# EAGLE board Charger Controller, HV Board, TSAL, Strain Guage, and ADIS Practice (EAGLE 9.5.2), part 1 of 2
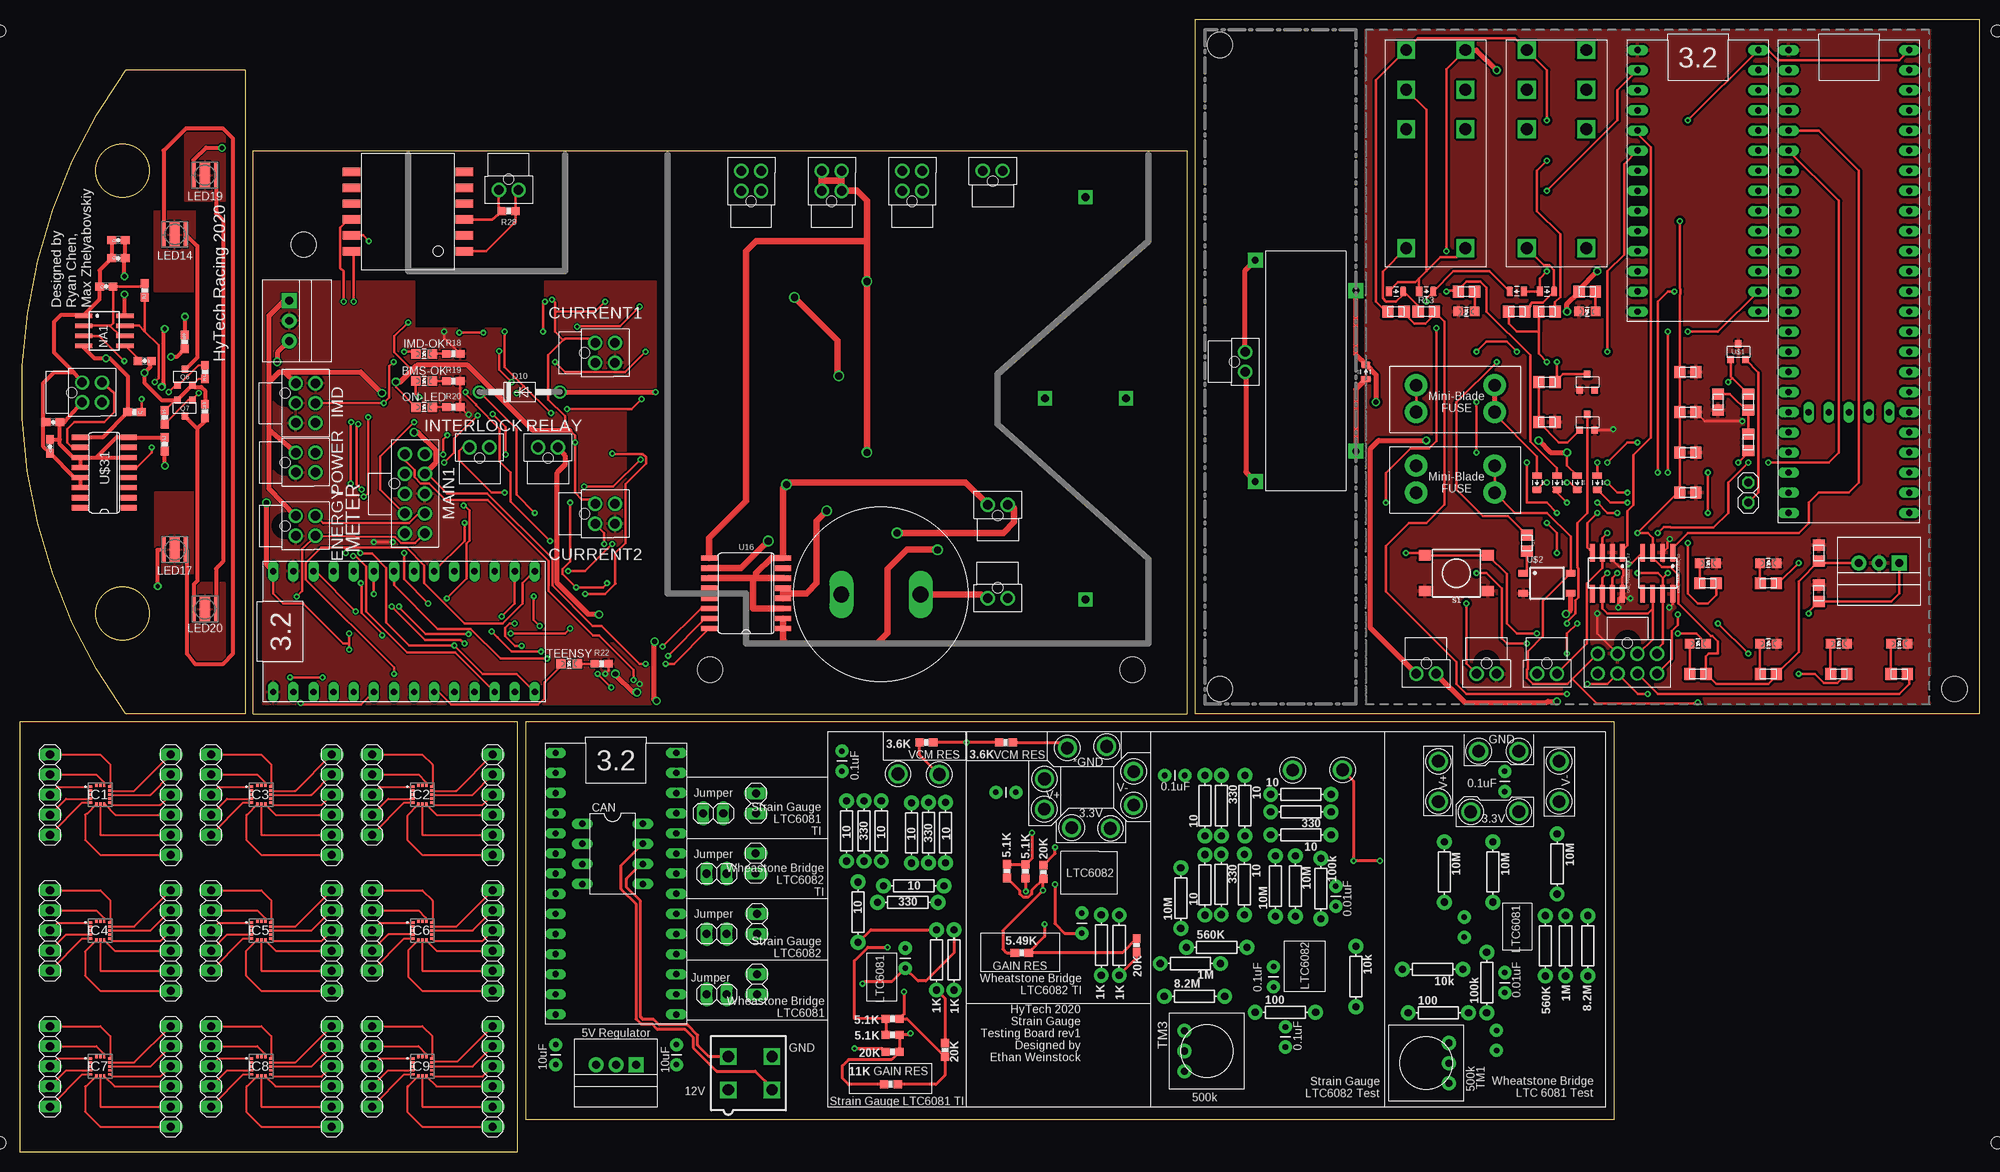
[diagram p0: board, top side]
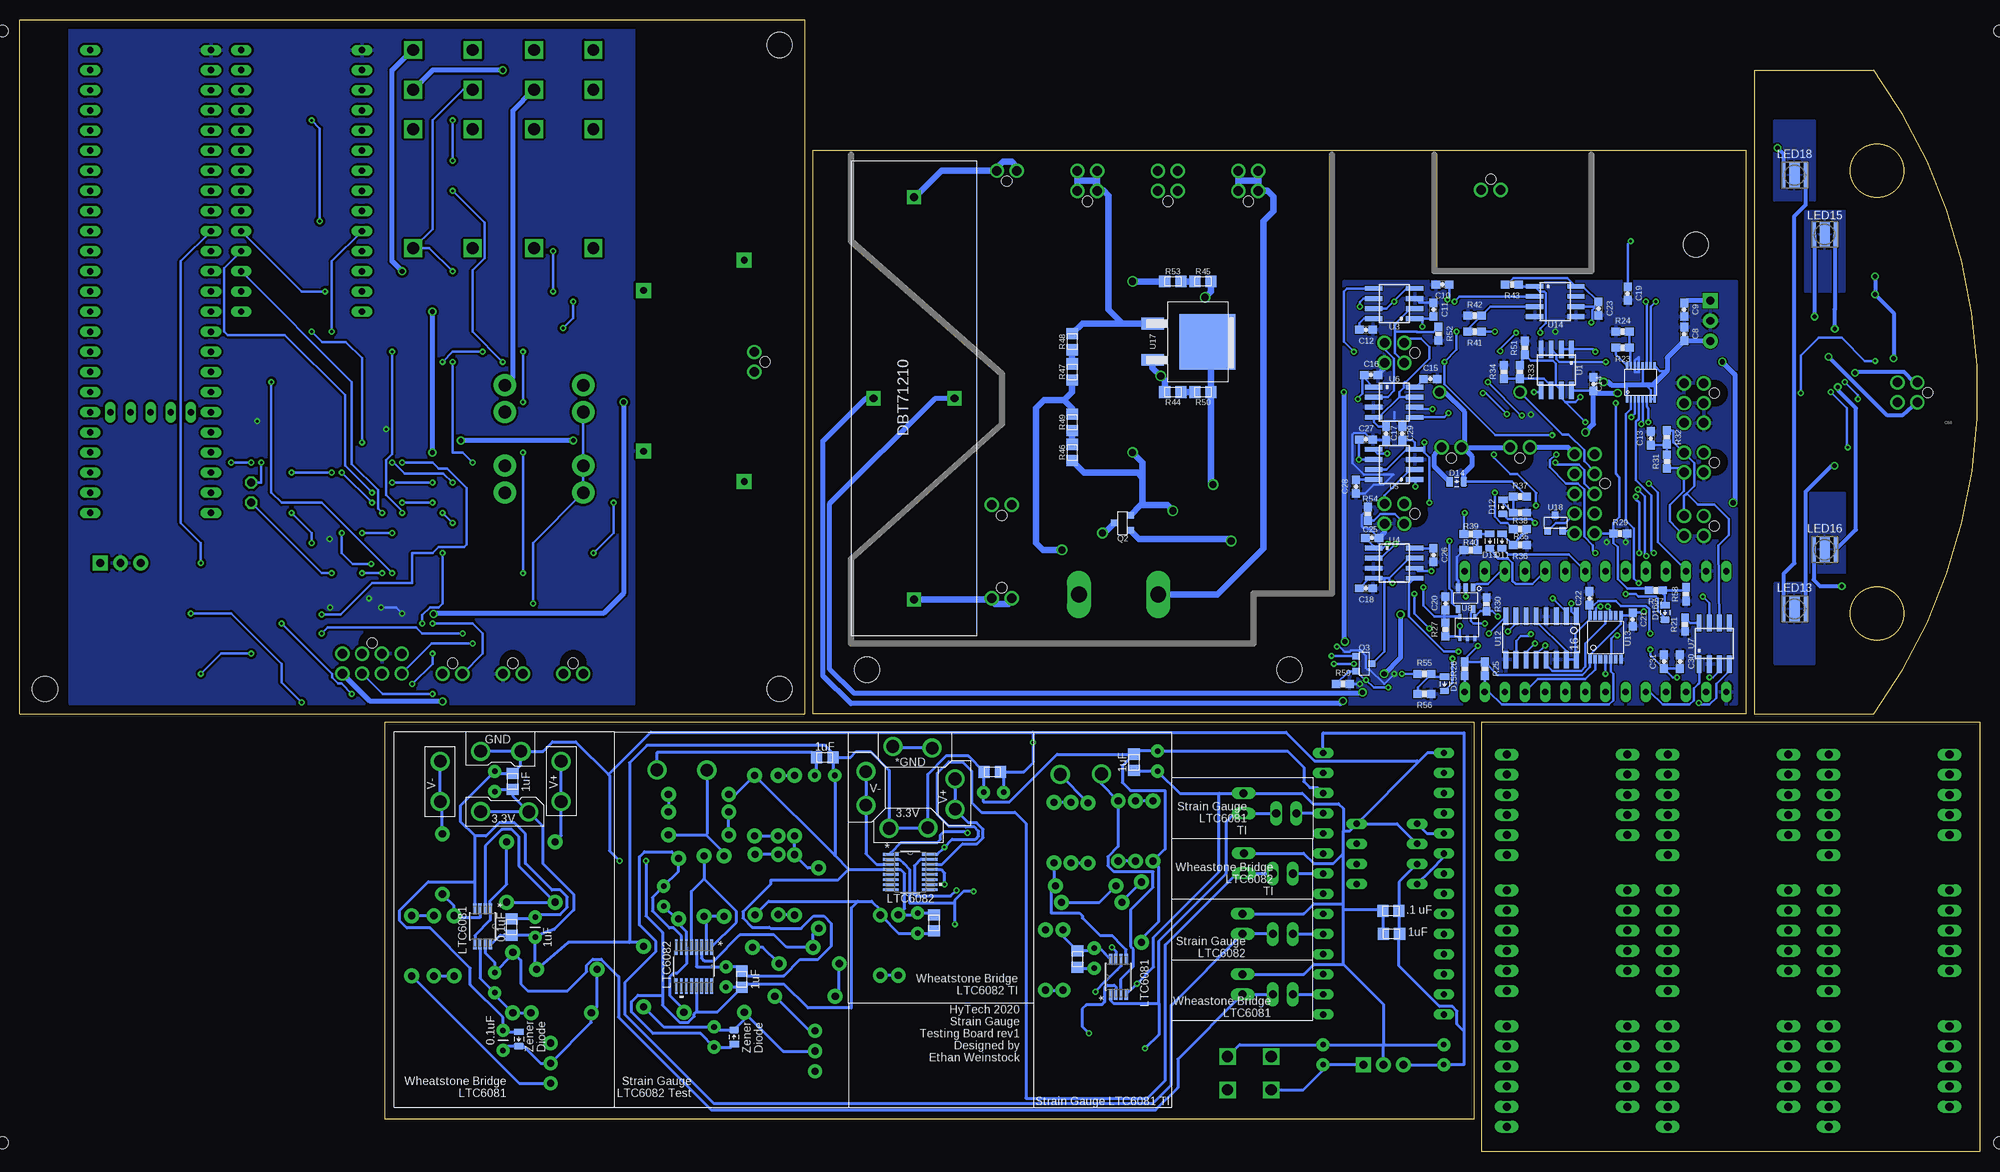
[diagram p1: board, bottom side, seen from below]

Size 247.35 x 142.9 mm. Coordinates in mm from the lower left corner, seen from the top.
Outline: 247.34,55.27 247.34,142.9 148.28,142.9 148.28,55.27 247.34,55.27
Outline: 29.44,55.27 147.3,55.27 147.3,126.39 29.44,126.39 29.44,55.27
Outline: 0,0 62.84,0 62.84,54.28 0,54.28 0,0
Outline: 201.23,54.28 63.84,54.28 63.84,4.09 201.23,4.09 201.23,54.28
Outline: 28.45,136.55 28.45,55.27 13.34,55.27 arc-71 13.36,136.55 28.45,136.55
Outline: circle at 12.95,123.85 radius 3.35
Outline: circle at 12.95,67.97 radius 3.35
Copper layers (1*16): Top 0.035mm / dielectric 1.5mm / Bottom 0.035mm
Design rules "DRC Advanced Circuits *": minimum track width 6mil, minimum drill 10mil, track to track 6mil, track to pad 6mil, pad to pad 6mil, via to via 6mil, smd to smd 6mil, copper to edge 40mil, drill to drill 6mil, minimum pad ring 10mil, minimum via ring 8mil, stop-mask expansion 4mil, vias tented up to drill 0mil, thermal gap 10mil
Net classes: 1 TS: clearance 2.25 mm to class 0; 2 ISO_SPI: clearance 2.25 mm to class 0, clearance 2.25 mm to class 1
Holes 3.2 mm at 244.17,58.45 151.46,139.73 151.46,58.45 35.84,114.5 140.44,60.86 87.1,60.86
Holes 1.5 mm at 249.56,141.48 -2.54,141.48 -2.54,1.14 249.56,1.14
tKeepout: area 241.2,55.4 to 247.2,61.4; area 148.5,136.7 to 154.5,142.7; area 148.5,55.4 to 154.5,61.4
tRestrict: area 241.2,55.4 to 247.2,61.4; area 148.5,136.7 to 154.5,142.7; area 148.5,55.4 to 154.5,61.4; area 32.8,111.5 to 38.8,117.5; area 84.1,57.9 to 90.1,63.9; area 137.4,57.9 to 143.4,63.9

## Footprints (pad centres in the part's own frame; a part is rotated, then mirrored left to right if it is on the bottom)
MINI-BLADE_FUSE_HOLDER = drill 1.613 pad 2.794: L1 0,3.404; L2 0,0; R1 9.906,3.404; R2 9.906,0
LED-805 = smd 1.2 x 1.2: A 0,-1.05; C 0,1.05
RELAY_DPDT = drill 1.5 square: 2 10.008,0; 3 5.004,0; 4 0,0; 5 0,7.493; 6 5.004,7.493; 7 10.008,7.493; COIL+ 25.019,0; COIL- 25.019,7.493
0805 = smd 1.4 x 1.5: 1 -1.025,0; 2 1.025,0
0603-CAP = smd 1.1 x 1: 1 -0.85,0; 2 0.85,0
LLS2V221MELZ = drill 2 long: P$1 -5,0; P$2 5,0
CAP-PTH-SMALL = drill 0.7 pad 1.651: 1 0,0; 2 2.54,0
1X02_SLIM = drill 1.016 octagon: 1 -1.27,0; 2 1.27,0
SOIC-08 = smd 0.6 x 2.2: 1 -1.905,-2.6; 2 -0.635,-2.6; 3 0.635,-2.6; 4 1.905,-2.6; 5 1.905,2.6; 6 0.635,2.6; 7 -0.635,2.6; 8 -1.905,2.6
NANO-FIT_VERTICAL-2 = drill 1.2: P$1 -1.25,0; P$2 1.25,0 | hole 1.3: 0,-1.34
NANO-FIT_VERTICAL-4 = drill 1.2: P$1 -1.25,0; P$2 1.25,0; P$3 -1.25,2.5; P$4 1.25,2.5 | hole 1.3: 0,-1.34
0805_D = smd 0.8 x 1.2: A -0.9,0; C 0.9,0
DO-41 = drill 1.118: A 5.08,0; C -5.08,0
3X3LGA = smd 0.5 x 0.3: 1 -1.25,1; 2 -1.25,0.5; 3 -1.25,0; 4 -1.25,-0.5; 5 -1.25,-1; 9 1.25,-1; 10 1.25,-0.5; 11 1.25,0; 12 1.25,0.5; 13 1.25,1 | smd 0.3 x 0.5: 6 -0.5,-1.25; 7 0,-1.25; 8 0.5,-1.25; 14 0.5,1.25; 15 0,1.25; 16 -0.5,1.25
NANO-FIT_VERTICAL-6 = drill 1.2: P$1 -2.5,0; P$2 0,0; P$3 2.5,0; P$4 -2.5,2.5; P$5 0,2.5; P$6 2.5,2.5 | hole 1.3: -1.25,-1.34
1X02 = drill 1.016 long: 1 -1.27,0; 2 1.27,0
1X06 = drill 1.016 long: 1 -6.35,0; 2 -3.81,0; 3 -1.27,0; 4 1.27,0; 5 3.81,0; 6 6.35,0
1X05 = drill 1.016 long: 1 -5.08,0; 2 -2.54,0; 3 0,0; 4 2.54,0; 5 5.08,0
XP-E2 = smd 0.5 x 3.3: A -1.4,0; C 1.4,0 | smd 1.3 x 3.3: X 0,0
NANO-FIT_VERTICAL-8 = drill 1.2: P$1 -3.75,0; P$2 -1.25,0; P$3 1.25,0; P$4 3.75,0; P$5 -3.75,2.5; P$6 -1.25,2.5; P$7 1.25,2.5; P$8 3.75,2.5 | hole 1.3: 0,-1.34
NANO-FIT_VERTICAL-10 = drill 1.2: P$1 -5,0; P$2 -2.5,0; P$3 0,0; P$4 2.5,0; P$5 5,0; P$6 -5,2.5; P$7 -2.5,2.5; P$8 0,2.5; P$9 2.5,2.5; P$10 5,2.5 | hole 1.3: -1.27,-1.34
SOT23 = smd 0.8 x 0.9: 1 -0.95,-1; 2 0.95,-1; 3 0,1
0603-RES = smd 1.1 x 1: 1 -0.85,0; 2 0.85,0
AXIAL-0.3 = drill 0.9 pad 1.88: P$1 -3.81,0; P$2 3.81,0
OKI-78SR = drill 1 pad 1.88 square: 1 -2.54,0 | drill 1 pad 1.88: 2 0,0; 3 2.54,0
TACTILE_SWITCH_SMD_6.2MM_TALL = smd 1.55 x 1.3: A1 -3.975,-2.25; A2 3.975,-2.25; B1 -3.975,2.25; B2 3.975,2.25
TEENSY_3.2_SIMPLE = drill 0.8 long: 3.3V 16.51,29.21; A0 16.51,3.81; A1 16.51,6.35; A2 16.51,8.89; A3 16.51,11.43; A4 16.51,13.97; A5 16.51,16.51; A6 16.51,19.05; A7 16.51,21.59; A8 16.51,24.13; A9 16.51,26.67; AGND 16.51,31.75; D0(RX1) 1.27,31.75; D1(TX1) 1.27,29.21; D2 1.27,26.67; D3(CANTX) 1.27,24.13; D4(CANRX) 1.27,21.59; D5 1.27,19.05; D6 1.27,16.51; D7(RX3) 1.27,13.97; D8(TX3) 1.27,11.43; D9(RX2) 1.27,8.89; D10(TX2) 1.27,6.35; D11 1.27,3.81; D12 1.27,1.27; D13 16.51,1.27; GND 1.27,34.29; VIN 16.51,34.29
TRIM-3386 = drill 0.9 pad 1.778: 1 -2.54,-2.857; 2 0,-2.857; 3 2.54,-2.857
SOT-23-5 = smd 1 x 0.55: 1 -1.35,0.95; 2 -1.35,0; 3 -1.35,-0.95; 4 1.35,-0.95; 5 1.35,0.95
MSOP-16 = smd 0.305 x 0.889: 1 -0.1,-0.5; 2 0.4,-0.5; 3 0.9,-0.5; 4 1.4,-0.5; 5 1.9,-0.5; 6 2.4,-0.5; 7 2.9,-0.5; 8 3.4,-0.5; 9 3.4,3.7; 10 2.9,3.7; 11 2.4,3.7; 12 1.9,3.7; 13 1.4,3.7; 14 0.9,3.7; 15 0.4,3.7; 16 -0.1,3.7
SOT23-5 = smd 0.61 x 0.406: EN -2.794,0; GND -2.794,0.94; VCC 0,1.905; WDI 0,0; WDO -2.794,1.905
HM2102NLT = smd 1.067 x 2.184: P$1 0,0; P$2 2,0; P$3 4,0; P$4 6,0; P$5 8,0; P$6 10,0; P$7 10,14.25; P$8 8,14.25; P$9 6,14.25; P$10 4,14.25; P$11 2,14.25; P$12 0,14.25
SOIC-16 = smd 0.6 x 2.2: 1 -4.445,-2.794; 2 -3.175,-2.794; 3 -1.905,-2.794; 4 -0.635,-2.794; 5 0.635,-2.794; 6 1.905,-2.794; 7 3.175,-2.794; 8 4.445,-2.794; 9 4.445,2.667; 10 3.175,2.667; 11 1.905,2.667; 12 0.635,2.667; 13 -0.635,2.667; 14 -1.905,2.667; 15 -3.175,2.667; 16 -4.445,2.667
TSSOP-14 = smd 0.45 x 1.1: 1 -1.958,-2.618; 2 -1.308,-2.618; 3 -0.657,-2.618; 4 -0.007,-2.618; 5 0.642,-2.618; 6 1.292,-2.618; 7 1.942,-2.618; 8 1.942,2.918; 9 1.292,2.918; 10 0.642,2.918; 11 -0.007,2.918; 12 -0.657,2.918; 13 -1.308,2.918; 14 -1.958,2.918
DBT71210 = drill 1 pad 1.778 square: COIL+ 30,-13; COIL- 30,-2.8; CONTACT1 55.4,-7.9; CONTACT2 4.6,-7.9
SO16-DW = smd 0.66 x 2.032: 1 -4.445,-4.65; 2 -3.175,-4.65; 3 -1.905,-4.65; 4 -0.635,-4.65; 5 0.635,-4.65; 6 1.905,-4.65; 7 3.175,-4.65; 8 4.445,-4.65; 9 4.445,4.65; 10 3.175,4.65; 11 1.905,4.65; 12 0.635,4.65; 13 -0.635,4.65; 14 -1.905,4.65; 15 -3.175,4.65; 16 -4.445,4.65
TO-252 = smd 1.499 x 2.794: 1 -2.286,0; 3 2.286,0 | smd 7.01 x 7.01: 2(TAB) 0,6.909
SSOP-16_GN = smd 1.981 x 0.356: 1 -2.464,2.223; 2 -2.464,1.587; 3 -2.464,0.953; 4 -2.464,0.318; 5 -2.464,-0.318; 6 -2.464,-0.953; 7 -2.464,-1.587; 8 -2.464,-2.223; 9 2.464,-2.223; 10 2.464,-1.587; 11 2.464,-0.953; 12 2.464,-0.318; 13 2.464,0.318; 14 2.464,0.953; 15 2.464,1.587; 16 2.464,2.223
SOP04 = smd 0.8 x 1.2: 1 -1.27,-3; 2 1.27,-3; 3 1.27,3; 4 -1.27,3
KT12-1A-40L-THT = drill 0.85 pad 1.9 square: C1 4.95,11.45; C2 25.25,11.45; S1 1.13,-1.25; S2 29.07,-1.25
TEENSY_3.5_EXT = drill 0.8 long: 3.3V 16.51,54.61; 3.3V_1 1.27,24.13; 3.3V_2 6.35,13.97; A0 16.51,29.21; A1 16.51,31.75; A2 16.51,34.29; A3 16.51,36.83; A4 16.51,39.37; A5 16.51,41.91; A6 16.51,44.45; A7 16.51,46.99; A8 16.51,49.53; A9 16.51,52.07; A12 1.27,3.81; A13 1.27,1.27; A14 16.51,1.27; A15 16.51,3.81; A16 16.51,6.35; A17 16.51,8.89; A18 16.51,11.43; A19 16.51,13.97; A20 16.51,16.51; A21 16.51,19.05; A22 16.51,21.59; AGND 16.51,57.15; D0(RX1) 1.27,57.15; D1(TX1) 1.27,54.61; D2 1.27,52.07; D3(CANTX) 1.27,49.53; D4(CANRX) 1.27,46.99; D5 1.27,44.45; D6 1.27,41.91; D7(RX3) 1.27,39.37; D8(TX3) 1.27,36.83; D9(RX2) 1.27,34.29; D10(TX2) 1.27,31.75; D11 1.27,29.21; D12 1.27,26.67; D13 16.51,26.67; D24 1.27,21.59; D25 1.27,19.05; D26 1.27,16.51; D27 1.27,13.97; D28 1.27,11.43; D29 1.27,8.89; D30 1.27,6.35; GND 1.27,59.69; GND_1 16.51,24.13; GND_2 8.89,13.97; PROG 11.43,13.97; RST 13.97,13.97; VBAT 3.81,13.97; VIN 16.51,59.69
MSOP-8_MS = smd 1.397 x 0.432: 1 -2.21,0.975; 2 -2.21,0.325; 3 -2.21,-0.325; 4 -2.21,-0.975; 5 2.21,-0.975; 6 2.21,-0.325; 7 2.21,0.325; 8 2.21,0.975
TEST_POINT = drill 1.6: P$1 0,0
DIL08 = drill 0.813 long: 1 -3.81,-3.81; 2 -1.27,-3.81; 3 1.27,-3.81; 4 3.81,-3.81; 5 3.81,3.81; 6 1.27,3.81; 7 -1.27,3.81; 8 -3.81,3.81
SO16 = smd 0.66 x 2.032: 1 -4.445,-3.073; 2 -3.175,-3.073; 3 -1.905,-3.073; 4 -0.635,-3.073; 5 0.635,-3.073; 6 1.905,-3.073; 7 3.175,-3.073; 8 4.445,-3.073; 9 4.445,3.073; 10 3.175,3.073; 11 1.905,3.073; 12 0.635,3.073; 13 -0.635,3.073; 14 -1.905,3.073; 15 -3.175,3.073; 16 -4.445,3.073
MINIFIT_5566-4 = drill 1.4 square: 1 2.1,-2.75; 2 -2.1,-2.75; 3 2.1,2.75; 4 -2.1,2.75

## Placement (x,y rotation side)
5ABOARDFUSE  [MINI-BLADE_FUSE_HOLDER]  176.23,83.21 0 top
5ASHUTDOWNFUSE  [MINI-BLADE_FUSE_HOLDER]  176.23,93.37 0 top
BMS-OK  GREEN  [LED-805]  51.03,97.31 270 top
BMS_SHUTDOWN_RLY  RT424009  [RELAY_DPDT]  190.2,139.09 270 top
C1  1uF  [0805]  210.52,93.37 180 top
C2  .1uF  [0805]  210.52,98.45 180 top
C3  10uF  [0805]  227.03,70.51 270 top
C4  10uF  [0805]  227.03,75.59 270 top
C5  4.7nF  [0805]  214.33,94.64 270 top
C6  1uF  [0805]  210.52,83.21 180 top
C7  .1uF  [0805]  210.52,88.29 180 top
C8  10uF  [0603-CAP]  37.29,103.25 90 bottom
C9  10uF  [0603-CAP]  37.29,106.3 270 bottom
C10  0.1uF  [0603-CAP]  67.79,109.5 180 bottom
C11  0.1uF  [0603-CAP]  68.94,106.32 90 bottom
C12  530pF  [0603-CAP]  77.44,103.78 0 bottom
C13  4.7nF  [0603-CAP]  41.5,90.07 270 bottom
C14  0.1uF  [0603-CAP]  48.74,96.93 90 bottom
C15  530pF  [0603-CAP]  69.32,97.56 0 bottom
C16  0.1uF  [0603-CAP]  76.81,98.07 0 bottom
C17  0.1uF  [0603-CAP]  74.9,90.7 270 bottom
C18  0.1uF  [0603-CAP]  77.44,71.15 0 bottom
C19  27pF  [0603-CAP]  44.42,108.36 270 bottom
C20  0.1uF  [0603-CAP]  67.41,69.24 90 bottom
C21  0.1uF  [0603-CAP]  43.79,67.21 270 bottom
C22  0.1uF  [0603-CAP]  49.25,69.88 90 bottom
C23  0.1uF  [0603-CAP]  48.11,106.45 270 bottom
C24  180µF  [LLS2V221MELZ]  108.67,70.37 180 top
C25  0.1uF  [0603-CAP]  76.68,77.5 0 bottom
C26  530pF  [0603-CAP]  68.94,75.34 270 bottom
C27  0.1uF  [0603-CAP]  77.44,89.94 0 bottom
C28  530pF  [0603-CAP]  78.71,83.97 270 bottom
C29  0.1uF  [0603-CAP]  72.87,90.7 90 bottom
C30  0.1uF  [0603-CAP]  37.82,61.87 90 bottom
C31  0.1uF  [0603-CAP]  39.85,61.87 90 bottom
C38  0.1uF  [0805]  185.25,28.37 270 bottom
C39  0.1uF  [CAP-PTH-SMALL]  144.49,47.52 0 top
C40  1uF  [0805]  145.76,49.81 180 bottom
C41  0.01uF  [CAP-PTH-SMALL]  166.08,31.01 90 top
C42  0.1uF  [CAP-PTH-SMALL]  158.23,20.83 90 top
C43  1uF  [0805]  156.22,21.79 270 bottom
C44  0.1uF  [CAP-PTH-SMALL]  159.73,13.23 90 top
C45  0.01uF  [CAP-PTH-SMALL]  187.41,20.09 90 top
C46  0.1uF  [CAP-PTH-SMALL]  187.41,45.49 90 top
C47  1uF  [0805]  185.13,46.76 90 bottom
C48  0.1uF  [CAP-PTH-SMALL]  103.74,50.6 270 top
C49  1uF  [0805]  106.74,49.17 270 bottom
C50  0.1uF  [CAP-PTH-SMALL]  186.37,15.34 270 bottom
C51  1uF  [CAP-PTH-SMALL]  182.31,27.1 90 bottom
C52  10uF  [CAP-PTH-SMALL]  82.87,13.54 270 top
C53  10uF  [CAP-PTH-SMALL]  67.63,13.54 270 top
C54  .1 uF  [0805]  74.31,30.43 0 bottom
C55  1uF  [0805]  74.23,27.53 0 bottom
C56  0.1uF  [CAP-PTH-SMALL]  111.75,23.19 90 top
C57  1uF  [0805]  113.85,24.33 270 bottom
C58  0.1uF  [CAP-PTH-SMALL]  125.72,45.39 180 top
C59  1uF  [0805]  124.62,47.98 0 bottom
C60  1uF  [0805]  131.96,28.91 270 bottom
C61  0.1uF  [CAP-PTH-SMALL]  134.05,27.61 90 top
C62  4.7uF  [0603-CAP]  10.92,109.25 180 top
C63  10nF  [0603-CAP]  15.75,99.85 0 top
C64  0.1uF  [0603-CAP]  12.45,112.8 180 top
C65  1uF  [0603-CAP]  12.45,115.09 180 top
C66  1uF  [0603-CAP]  4.19,92.1 180 top
C67  0.1uF  [0603-CAP]  3.81,89.05 270 top
CAN_TERM_JMP  M02_SLIM  [1X02_SLIM]  218.14,83.21 90 top
CAN_TRANSCEIVER_3.2  MCP2551  [SOIC-08]  200.36,73.05 180 top
CAN_TRANSCEIVER_3.5  MCP2551  [SOIC-08]  206.71,73.05 180 top
CHARGER  CHARGE CONTROL  [NANO-FIT_VERTICAL-2]  154.64,99.72 270 top
CURRENT1  CURRENT  [NANO-FIT_VERTICAL-4]  72.62,100.86 270 top
CURRENT2  CURRENT  [NANO-FIT_VERTICAL-4]  72.62,80.54 270 top
D1  TS4148 RYG  [0805_D]  188.93,108.61 180 top
D2  TS4148 RYG  [0805_D]  199.09,84.48 270 top
D3  DIODE  [0805_D]  169.88,98.45 90 top
D4  TS4148 RYG  [0805_D]  196.55,84.48 270 top
D5  TS4148 RYG  [0805_D]  194.01,84.48 270 top
D6  TS4148 RYG  [0805_D]  192.74,108.61 0 top
D7  TS4148 RYG  [0805_D]  173.69,108.61 0 top
D8  TS4148 RYG  [0805_D]  191.47,84.48 270 top
D9  TS4148 RYG  [0805_D]  177.5,108.61 0 top
D10  DIODE  [DO-41]  63.09,95.91 0 top
D11  TS4148 RYG  [0805_D]  60.3,77.11 270 bottom
D12  TS4148 RYG  [0805_D]  60.17,81.43 270 bottom
D13  TS4148 RYG  [0805_D]  61.82,77.11 270 bottom
D14  TS4148 RYG  [0805_D]  66.01,84.61 0 bottom
D15  TS4148 RYG  [0805_D]  67.54,59.08 270 bottom
D16  TS4148 RYG  [0805_D]  39.73,68.1 270 bottom
DISCH+  DISCHARGE+  [NANO-FIT_VERTICAL-2]  122.78,123.85 0 top
ENERGYMETER  ENERGY METER  [NANO-FIT_VERTICAL-4]  34.82,79.02 270 top
HV+FUSED_1A-IMD+  HV+  [NANO-FIT_VERTICAL-4]  112.62,121.31 0 top
HV+UNFUSED  HV+UNFUSED  [NANO-FIT_VERTICAL-2]  123.42,69.88 180 top
HV-FUSED_1A-IMD-  HV-  [NANO-FIT_VERTICAL-4]  102.46,121.31 0 top
HV-UNFUSED_DISCHARGE-  HV-UNFUSED  [NANO-FIT_VERTICAL-4]  92.3,121.31 0 top
IC1  KX124-1051  [3X3LGA]  10.16,45.08 0 top
IC2  KX124-1051  [3X3LGA]  50.8,45.08 0 top
IC3  KX124-1051  [3X3LGA]  30.48,45.08 0 top
IC4  KX124-1051  [3X3LGA]  10.16,27.94 0 top
IC5  KX124-1051  [3X3LGA]  30.48,27.94 0 top
IC6  KX124-1051  [3X3LGA]  50.8,27.94 0 top
IC7  KX124-1051  [3X3LGA]  10.16,10.79 0 top
IC8  KX124-1051  [3X3LGA]  30.48,10.79 0 top
IC9  KX124-1051  [3X3LGA]  50.8,10.79 0 top
IMD  IMD  [NANO-FIT_VERTICAL-6]  34.82,94.51 270 top
IMD-OK  YELLOW  [LED-805]  51.03,100.74 270 top
IMD_SHUTDOWN_RLY  RT424009  [RELAY_DPDT]  174.96,139.09 270 top
INDICATOR  INDICATOR  [NANO-FIT_VERTICAL-2]  123.42,81.69 0 top
INTERLOCK  INTERLOCK  [NANO-FIT_VERTICAL-2]  58.01,88.93 0 top
ISO_SPI  ISO_SPI  [NANO-FIT_VERTICAL-2]  61.7,121.44 180 top
J1  JUMPER.1  [1X02]  87.95,19.89 0 top
J2  JUMPER.1  [1X02]  87.95,27.51 0 top
J3  JUMPER.1  [1X02]  87.95,35.13 0 top
J4  JUMPER.1  [1X02]  87.51,42.72 0 top
JP1  [1X06]  19.05,26.67 90 top
JP2  [1X06]  59.69,26.67 90 top
JP3  [1X05]  44.45,27.94 90 top
JP4  [1X05]  3.81,27.94 90 top
JP5  [1X06]  39.37,43.81 90 top
JP6  [1X05]  24.13,45.08 90 top
JP7  [1X06]  39.37,26.67 90 top
JP8  [1X05]  24.13,27.94 90 top
JP9  [1X06]  19.05,43.81 90 top
JP10  [1X05]  3.81,45.08 90 top
JP11  [1X06]  59.69,43.81 90 top
JP12  [1X05]  44.45,45.08 90 top
JP13  [1X06]  19.05,9.52 90 top
JP14  [1X05]  3.81,10.79 90 top
JP15  [1X06]  39.37,9.52 90 top
JP16  [1X05]  24.13,10.79 90 top
JP17  [1X06]  59.69,9.52 90 top
JP18  [1X05]  44.45,10.79 90 top
JP19  M02  [1X02]  93.03,21.16 270 top
JP20  M02  [1X02]  93.03,28.78 270 top
JP21  M02  [1X02]  92.9,43.99 270 top
JP22  M02  [1X02]  92.87,36.42 270 top
LED1  Purple  [LED-805]  220.68,64.16 270 top
LED3  Yellow  [LED-805]  237.19,64.16 270 top
LED4  Green  [LED-805]  229.57,64.16 270 top
LED6  White  [LED-805]  211.79,64.16 270 top
LED13  RED  [XP-E2]  23.37,68.53 180 bottom
LED14  GRN  [XP-E2]  19.56,115.8 0 top
LED15  GRN  [XP-E2]  19.56,115.8 0 bottom
LED16  GRN  [XP-E2]  19.56,76.02 180 bottom
LED17  GRN  [XP-E2]  19.56,76.02 0 top
LED18  RED  [XP-E2]  23.37,123.29 180 bottom
LED19  RED  [XP-E2]  23.37,123.29 0 top
LED20  RED  [XP-E2]  23.37,68.53 180 top
LT1790B  1.25V  [0805_D]  184.36,14.25 270 bottom
LT1790B2  1.25V  [0805_D]  157.19,14.5 90 bottom
MAIN  MAIN CONNECTOR  [NANO-FIT_VERTICAL-8]  202.9,62.89 180 top
MAIN1  MAIN  [NANO-FIT_VERTICAL-10]  48.62,83.08 270 top
NA1  NA555SO-8  [SOIC-08]  10.67,103.64 270 top
ON-LED  PURPLE  [LED-805]  51.03,94.01 270 top
POWER  POWER  [NANO-FIT_VERTICAL-2]  185.12,60.35 180 top
POWER1  POWER  [NANO-FIT_VERTICAL-4]  34.82,87.02 270 top
POWERTAIL  Powerswitch Tail  [NANO-FIT_VERTICAL-2]  192.74,60.35 180 top
Q1  [SOT23]  197.82,92.1 0 top
Q2  DMG3406L  [SOT23]  108.18,79.4 90 bottom
Q3  DMG3406L  [SOT23]  77.7,61.62 270 bottom
Q6  [SOT23]  20.83,97.82 0 top
Q7  [SOT23]  20.83,93.88 180 top
R1  20  [0805]  188.93,106.07 0 top
R1_1  5.1K  [0603-RES]  110.15,14.76 180 top
R1_2  20K  [0603-RES]  110.15,12.62 180 top
R1_3  5.1K  [0603-RES]  110.15,16.81 180 top
R1_4  20K  [0603-RES]  116.75,12.88 270 top
R1_5  20K  [0603-RES]  140.96,26.09 90 top
R1_6  5.1K  [0603-RES]  124.6,35.43 90 top
R1_7  20K  [0603-RES]  129.17,35.33 90 top
R1_8  5.1K  [0603-RES]  126.93,35.41 90 top
R1_9  5.49K  [0603-RES]  126.45,25.15 180 top
R1_11  11K  [0603-RES]  109.94,8.53 180 top
R2  2k  [0805]  192.74,106.07 0 top
R3  2k  [0805]  182.58,108.61 0 top
R4  20k  [0805]  197.82,108.61 0 top
R5  270  [0805]  220.68,60.35 180 top
R6  5.1k  [0805]  211.79,60.35 180 top
R7  2k  [0805]  237.19,60.35 180 top
R8  33  [0805]  229.57,60.35 180 top
R9  60  [0805]  218.14,94.64 270 top
R10  60  [0805]  218.14,89.56 270 top
R11  40k  [0805]  192.74,97.18 0 top
R12  10k  [0805]  192.74,92.1 180 top
R13  20  [0805]  177.5,106.07 180 top
R14  360  [0805]  190.2,76.86 270 top
R15  68  [0805]  213.06,71.78 0 top
R16  2k  [0805]  173.69,106.07 180 top
R17  68  [0805]  220.68,71.78 0 top
R18  820  [0603-RES]  54.71,100.74 180 top
R19  2k  [0603-RES]  54.71,97.31 0 top
R20  270  [0603-RES]  54.71,94.01 0 top
R21  1k  [0603-RES]  37.19,66.57 90 bottom
R22  43  [0603-RES]  73.43,61.62 0 top
R23  1k  [0603-RES]  45.06,101.5 0 bottom
R24  1k  [0603-RES]  45.06,103.53 180 bottom
R25  2k  [0603-RES]  62.46,60.99 270 bottom
R26  2k  [0603-RES]  65,60.99 270 bottom
R27  430  [0603-RES]  67.41,65.94 270 bottom
R28  100  [0603-RES]  61.7,118.77 180 top
R29  2k  [0603-RES]  45.36,78.08 0 bottom
R30  10k  [0603-RES]  62.23,69.11 90 bottom
R31  60  [0603-RES]  39.47,87.15 270 bottom
R32  60  [0603-RES]  39.47,90.2 90 bottom
R33  4k  [0603-RES]  58.01,98.45 90 bottom
R34  2k  [0603-RES]  60.05,98.45 270 bottom
R35  43k  [0603-RES]  58.01,78.64 0 bottom
R36  12k  [0603-RES]  58.01,76.61 180 bottom
R37  43k  [0603-RES]  58.01,82.7 180 bottom
R38  12k  [0603-RES]  58.01,80.67 180 bottom
R39  43k  [0603-RES]  64.24,78 0 bottom
R40  12k  [0603-RES]  64.24,75.97 0 bottom
R41  261  [0603-RES]  63.73,103.53 0 bottom
R42  5K  [0603-RES]  63.73,105.56 0 bottom
R43  2k  [0603-RES]  59.03,109.5 180 bottom
R44  2k  [0805]  101.83,95.91 0 bottom
R45  20k  [0805]  98.02,109.88 180 bottom
R46  1.4k  [0805]  114.53,88.29 90 bottom
R47  510k  [0805]  114.53,98.45 270 bottom
R48  510k  [0805]  114.53,102.26 90 bottom
R49  14k  [0805]  114.53,92.1 90 bottom
R50  2k  [0805]  98.02,95.91 0 bottom
R51  2k  [0603-RES]  57.38,101.5 90 bottom
R52  10K  [0603-RES]  68.3,103.28 270 bottom
R53  20k  [0805]  101.83,109.88 180 bottom
R54  10K  [0603-RES]  77.19,80.54 90 bottom
R55  5k  [0603-RES]  70.08,60.35 0 bottom
R56  5k  [0603-RES]  70.08,57.81 180 bottom
R57  43k  [0603-RES]  40.87,70.89 0 bottom
R58  12k  [0603-RES]  37.06,70.38 90 bottom
R59  2k  [0603-RES]  80.37,59.08 0 bottom
R67  10M  [AXIAL-0.3]  179.79,35.33 270 top
R68  10  [AXIAL-0.3]  149.57,43.71 270 top
R69  10  [AXIAL-0.3]  149.59,33.71 90 top
R70  10M  [AXIAL-0.3]  158.46,33.55 270 top
R71  10M  [AXIAL-0.3]  146.52,32.03 270 top
R72  10M  [AXIAL-0.3]  194.02,36.35 270 top
R73  8.2M  [AXIAL-0.3]  148.25,19.66 0 top
R74  10M  [AXIAL-0.3]  161,33.55 270 top
R75  100k  [AXIAL-0.3]  164.22,33.22 90 top
R76  100  [AXIAL-0.3]  159.73,17.63 0 top
R77  10k  [AXIAL-0.3]  168.62,22.12 90 top
R78  10  [AXIAL-0.3]  105.8,30.25 90 top
R79  330  [AXIAL-0.3]  114.69,40.28 90 top
R80  10  [AXIAL-0.3]  154.6,43.71 270 top
R81  8.2M  [AXIAL-0.3]  197.88,26.01 270 top
R82  10  [AXIAL-0.3]  112.84,33.58 0 top
R83  10  [AXIAL-0.3]  116.83,40.28 270 top
R84  330  [AXIAL-0.3]  151.62,33.76 270 top
R85  10M  [AXIAL-0.3]  185.89,35.33 270 top
R86  330  [AXIAL-0.3]  112.05,31.5 0 top
R87  10  [AXIAL-0.3]  112.53,40.26 270 top
R88  330  [AXIAL-0.3]  151.67,43.71 90 top
R89  10  [AXIAL-0.3]  154.57,33.73 90 top
R90  1M  [AXIAL-0.3]  147.74,23.77 0 top
R91  100k  [AXIAL-0.3]  185.13,21.36 90 top
R92  560K  [AXIAL-0.3]  151.06,25.83 0 top
R93  1M  [AXIAL-0.3]  195.08,26.01 270 top
R94  560K  [AXIAL-0.3]  192.54,26.01 270 top
R95  100  [AXIAL-0.3]  179.03,17.55 0 top
R96  10k  [AXIAL-0.3]  178.32,23.04 0 top
R97  3.6K  [0603-RES]  114.41,51.66 180 top
R98  330  [AXIAL-0.3]  106.54,40.51 90 top
R99  10  [AXIAL-0.3]  104.33,40.51 270 top
R100  10  [AXIAL-0.3]  108.72,40.51 270 top
R101  1K  [AXIAL-0.3]  115.71,24.23 90 top
R102  10  [AXIAL-0.3]  161.68,40.01 180 top
R103  10  [AXIAL-0.3]  161.68,45.14 180 top
R104  330  [AXIAL-0.3]  161.68,42.93 0 top
R105  1K  [AXIAL-0.3]  117.89,24.23 270 top
R106  1K  [AXIAL-0.3]  136.49,26.11 90 top
R107  1K  [AXIAL-0.3]  138.75,26.09 270 top
R108  3.6K  [0603-RES]  124.45,51.69 0 top
R109  330R  [0603-RES]  20.83,102.26 90 top
R110  50k  [0603-RES]  15.75,108.74 270 top
R111  330R  [0603-RES]  18.29,89.31 90 top
R112  1k  [0603-RES]  14.48,93.37 0 top
R113  2k  [0603-RES]  23.37,93.5 90 top
R114  2k  [0603-RES]  23.37,98.45 270 top
R115  2k  [0603-RES]  18.29,92.74 90 top
REG  5V  [OKI-78SR]  234.65,74.32 180 top
REG1  5V  [OKI-78SR]  75.25,11 180 top
RELAY  RELAY  [NANO-FIT_VERTICAL-2]  66.65,88.93 0 top
S1  [TACTILE_SWITCH_SMD_6.2MM_TALL]  181.31,73.05 180 top
SHUTDOWN_B  Yellow  [LED-805]  182.58,106.07 90 top
SHUTDOWN_BUTTON  Shutdown Button  [NANO-FIT_VERTICAL-2]  177.5,60.35 180 top
SHUTDOWN_C  Green  [LED-805]  197.82,106.07 90 top
STATUS  RED  [LED-805]  213.06,74.32 270 top
STATUS1  RED  [LED-805]  220.68,74.32 270 top
TEENSY  BLUE  [LED-805]  69.32,61.62 270 top
TEENSY3.2  TEENSY_3.2_SIMPLE  [TEENSY_3.2_SIMPLE]  66.27,56.79 90 top
TM1  500k  [TRIM-3386]  177.51,11.2 90 top
TM3  500k  [TRIM-3386]  149.82,12.73 270 top
U1  OPA2172  [SOIC-08]  53.44,98.7 180 bottom
U2  OKI-78SR-5  [OKI-78SR]  33.99,104.9 270 top
U3  MAX7480  [SOIC-08]  73.89,107.09 90 bottom
U4  MAX7480  [SOIC-08]  73.89,74.32 270 bottom
U5  MAX7480  [SOIC-08]  73.89,86.77 90 bottom
U6  MAX7480  [SOIC-08]  73.89,94.64 270 bottom
U7  MCP2551  [SOIC-08]  33.5,64.16 0 bottom
U8  SN74LVC1G08  [SOT-23-5]  64.87,69.9 270 bottom
U9  LTC6820  [MSOP-16]  44.42,95.53 0 bottom
U10  STWD100  [SOT23-5]  63.7,67.59 90 bottom
U11  HM2102NLT  [HM2102NLT]  56.11,113.69 90 top
U12  MCP3208SOIC  [SOIC-16]  55.35,64.8 180 bottom
U13  TXB0104TSSOP  [TSSOP-14]  47.22,64.8 0 bottom
U14  MCP6542SOIC  [SOIC-08]  53.57,107.34 270 bottom
U15  [DBT71210]  126.59,125.12 270 bottom
U16  UCC21520A  [SO16-DW]  91.67,70.51 90 top
U17  LR8  [TO-252]  104.37,102.26 270 bottom
U18  CDSOT23-T24CAN-Q  [SOT23]  53.57,79.4 0 bottom
U19  LTC6082CGNPBF  [SSOP-16_GN]  162.27,23.39 270 bottom
U20  LTC6082CGNPBF  [SSOP-16_GN]  134.96,35.33 0 bottom
U$1  CDSOT23-T24CAN-Q  [SOT23]  216.87,100.99 0 top
U$2  CPC1002N  [SOP04]  192.74,71.78 270 top
U$3  KT12-1A-40L-THT  [KT12-1A-40L-THT]  157.18,113.69 270 top
U$4  TEENSY_3.2_SIMPLE  [TEENSY_3.2_SIMPLE]  202.9,104.8 0 top
U$5  TEENSY_3.5_EXT  [TEENSY_3.5_EXT]  221.95,79.4 0 top
U$7  LTC6081  [MSOP-8_MS]  188.94,28.47 270 bottom
U$8  TEENSY_3.2_SIMPLE  [TEENSY_3.2_SIMPLE]  66.36,16.08 0 top
U$9  TEST_POINT  [TEST_POINT]  110.83,47.7 180 top
U$10  TEST_POINT  [TEST_POINT]  160.64,48.18 180 top
U$11  TEST_POINT  [TEST_POINT]  189.19,42.95 180 top
U$12  TEST_POINT  [TEST_POINT]  179.03,49.3 90 top
U$13  TEST_POINT  [TEST_POINT]  179.03,44.22 90 top
U$14  TEST_POINT  [TEST_POINT]  184.11,50.57 180 top
U$15  TEST_POINT  [TEST_POINT]  189.19,50.57 180 top
U$16  TEST_POINT  [TEST_POINT]  194.27,44.22 270 top
U$17  TEST_POINT  [TEST_POINT]  194.27,49.3 270 top
U$18  TEST_POINT  [TEST_POINT]  183.12,42.93 180 top
U$19  TEST_POINT  [TEST_POINT]  116.04,47.65 180 top
U$20  TEST_POINT  [TEST_POINT]  166.94,48.21 180 top
U$21  LTC6081  [MSOP-8_MS]  108.7,22.1 90 bottom
U$22  MCP2551DIL  [DIL08]  74.81,37.62 270 top
U$23  TEST_POINT  [TEST_POINT]  132.75,40.92 180 top
U$24  TEST_POINT  [TEST_POINT]  129.3,43.26 90 top
U$25  TEST_POINT  [TEST_POINT]  129.32,47.09 90 top
U$26  TEST_POINT  [TEST_POINT]  132.19,50.98 180 top
U$27  TEST_POINT  [TEST_POINT]  137.17,51.18 180 top
U$28  TEST_POINT  [TEST_POINT]  140.57,43.76 90 top
U$29  TEST_POINT  [TEST_POINT]  140.57,48.01 90 top
U$30  TEST_POINT  [TEST_POINT]  137.63,40.84 180 top
U$31  MAX4622  [SO16]  10.67,85.75 90 top
X2  CONNECTOR-4  [MINIFIT_5566-4]  92.16,9.93 270 top
X3  CONNECTOR-4NANO-FIT-VERTICAL-4  [NANO-FIT_VERTICAL-4]  7.87,95.87 270 top
ZENER  [SOT23]  197.82,97.18 0 top

## Library data of the parts
5ABOARDFUSE 5ASHUTDOWNFUSE BMS-OK BMS_SHUTDOWN_RLY C1-C31 C38-C67 CAN_TERM_JMP CAN_TRANSCEIVER_3.2 CAN_TRANSCEIVER_3.5 CHARGER CURRENT1 CURRENT2 D1-D16 DISCH+ ENERGYMETER HV+FUSED_1A-IMD+ HV+UNFUSED HV-FUSED_1A-IMD- HV-UNFUSED_DISCHARGE- IMD IMD-OK IMD_SHUTDOWN_RLY INDICATOR INTERLOCK ISO_SPI J1-J4 JP1-JP22 LED1 LED3 LED4 LED6 LED13-LED20 LT1790B LT1790B2 MAIN MAIN1 NA1 ON-LED POWER POWER1 POWERTAIL Q1-Q3 Q6 Q7 R1 R1_1-R1_9 R1_11 R2-R59 R67-R115 REG REG1 RELAY S1 SHUTDOWN_B SHUTDOWN_BUTTON SHUTDOWN_C STATUS STATUS1 TEENSY TEENSY3.2 TM1 TM3 U1-U18 U$1-U$5 U$7-U$31 X3 ZENER = HyTechDevices
IC1-IC9 = samacsys; DESCRIPTION: TRI-AXIS, USER SELECTABLE +/- 2G, 4G, 8G, DIGITAL (I2C/SPI) OUTPUT, INTEGRATED FIFO/FILO BUFFER, 3X3X0.9MM LGA - KX124-1051; HEIGHT: mm; MANUFACTURER_NAME: Kionix; MANUFACTURER_PART_NUMBER: KX124-1051; MOUSER_PART_NUMBER: 912-KX124-1051-FR; MOUSER_PRICE-STOCK: https://www.mouser.com/Search/Refine.aspx?Keyword=912-KX124-1051-FR
U19 U20 = HyTechDevices; MANUFACTURER_PART_NUMBER: LTC6082CGN#PBF; VENDOR: Linear Technology
X2 = HyTechDevices; OC_FARNELL: unknown; OC_NEWARK: unknown

## Nets
3V3: C38.2 C39.1 C40.1 C42.2 C43.1 C46.1 C47.1 C48.1 C49.1 C51.1 C56.2 C57.1 C58.1 C59.1 C60.1 C61.2 R77.P$2 R78.P$1 R80.P$1 R96.P$2 R99.P$2 R101.P$2 R103.P$2 R106.P$2 U19.4 U20.4 U$7.8 U$8.3.3V U$11.P$1 U$18.P$1 U$21.8 U$23.P$1 U$30.P$1
60V_THRESHOLD_SIGNAL: MAIN1.P$1 Q3.2 R55.1 R59.1
60V_THRESHOLD_TEENSY: D15.C TEENSY3.2.A6
+3V3: C21.1 R25.1 R26.1 TEENSY3.2.3.3V U8.5 U9.6 U13.1 U13.8
+5V: C1.2 C2.2 C4.2 C6.2 C7.2 CAN_TRANSCEIVER_3.2.3 CAN_TRANSCEIVER_3.5.3 POWERTAIL.P$1 R5.1 R6.1 REG.3 U$4.VIN U$5.VIN
+5V1: C8.1 C10.1 C17.1 C18.1 C20.1 C22.1 C23.1 C29.1 C30.1 C31.1 CURRENT1.P$1 CURRENT2.P$1 ON-LED.A Q3.3 R27.1 R43.2 TEENSY3.2.VIN U2.3 U3.4 U3.7 U4.4 U4.7 U5.4 U5.7 U6.4 U6.7 U7.3 U9.1 U9.7 U9.8 U9.9 U9.12 U10.VCC U12.5 U12.15 U12.16 U13.14 U14.6 U14.8
+5V2: C53.2 C54.2 C55.2 REG1.3 U$8.VIN U$22.3
+12V: 5ABOARDFUSE.R1 5ABOARDFUSE.R2 C3.2 MAIN.P$4 REG.1 U$2.4
+12V1: C9.1 C14.1 ENERGYMETER.P$1 IMD.P$1 MAIN1.P$7 POWER1.P$1 U1.8 U2.1 U16.16
+12V2: C52.2 REG1.1 X2.1
+12VIN: 5ABOARDFUSE.L1 5ABOARDFUSE.L2 5ASHUTDOWNFUSE.L1 5ASHUTDOWNFUSE.L2 POWER.P$2
BMS_OK: MAIN.P$7 R1.1 R2.1 R8.1
BMS_OK_3.3V: U1.5 U8.4
BMS_OK_10V: BMS-OK.A MAIN1.P$4 R33.2 R51.1 U1.7
BMS_OK_RELAY: BMS_SHUTDOWN_RLY.COIL+ D6.C R1.2
BMS_PWR_STEP: BMS_SHUTDOWN_RLY.3 BMS_SHUTDOWN_RLY.COIL- D1.A D6.A
BSPD_CURR_REFERENCE: R41.1 R42.2 U14.3
BSPD_CURR_SIGNAL: MAIN1.P$3 R43.1 U14.1
CANH: CAN_TERM_JMP.1 CAN_TRANSCEIVER_3.2.7 CAN_TRANSCEIVER_3.5.7 MAIN.P$1 U$1.2
CANH1: ENERGYMETER.P$4 MAIN1.P$10 POWER1.P$4 R31.2 U7.7 U18.2
CANH2: U$22.7 X2.3
CANL: CAN_TRANSCEIVER_3.2.6 CAN_TRANSCEIVER_3.5.6 MAIN.P$2 R9.1 U$1.1
CANL1: ENERGYMETER.P$3 MAIN1.P$9 POWER1.P$3 R32.2 U7.6 U18.1
CANL2: U$22.6 X2.2
CHARGE_CONTROL: D3.C U$2.3 U$3.C1
CHARGE_ENABLE: MAIN.P$8 R11.2 ZENER.3
CHARGE_ENABLE1: D10.C MAIN1.P$2 R39.1
CHARGE_ENABLE_TEENSY: D13.C TEENSY3.2.A3
CHARGER_1: CHARGER.P$1 U$3.S1
CHARGER_2: CHARGER.P$2 U$3.S2
CS_LTC6820: TEENSY3.2.D10(TX2) U9.5
CS_MCP3208_3.3V: TEENSY3.2.D9(RX2) U13.2
CURR1_SENSE: CURRENT1.P$2 R52.1 U3.2
CURR1_SENSE_FILTERED: U3.5 U12.1 U14.2
CURR2_SENSE: CURRENT2.P$2 R54.1 U4.2
CURR2_SENSE_FILTERED: U4.5 U12.7
DISCHARGE_RELAY_GND: D14.A RELAY.P$2 U15.COIL-
GND: C1.1 C2.1 C3.1 C4.1 C5.2 C6.1 C7.1 CAN_TRANSCEIVER_3.2.2 CAN_TRANSCEIVER_3.2.8 CAN_TRANSCEIVER_3.5.2 CAN_TRANSCEIVER_3.5.8 D3.A LED1.C LED3.C LED4.C MAIN.P$3 POWER.P$1 Q1.2 R12.1 REG.2 S1.B1 S1.B2 SHUTDOWN_B.C SHUTDOWN_C.C STATUS1.C STATUS.C U$1.3 U$2.2 U$3.C2 U$4.GND U$5.GND ZENER.1
GND1: C8.2 C9.2 C10.2 C11.2 C12.2 C13.1 C14.2 C15.2 C16.2 C17.2 C18.2 C19.2 C20.2 C21.2 C22.2 C23.2 C25.2 C26.2 C27.2 C28.2 C29.2 C30.2 C31.2 CURRENT1.P$4 CURRENT2.P$4 ENERGYMETER.P$2 IMD.P$2 IMD.P$3 IMD.P$4 MAIN1.P$8 POWER1.P$2 R18.1 R19.2 R20.2 R21.1 R22.2 R24.2 R29.2 R30.2 R34.1 R36.1 R38.1 R40.1 R42.1 R51.2 R52.2 R54.2 R56.1 R58.1 R59.2 TEENSY3.2.AGND TEENSY3.2.GND U1.4 U2.2 U3.3 U4.3 U5.3 U6.3 U7.2 U8.3 U9.13 U9.14 U10.EN U10.GND U12.4 U12.9 U12.14 U13.7 U14.4 U14.5 U16.14 U18.3
GND1_A: IC1.5 JP10.1
GND1_B: IC2.5 JP12.1
GND1_C: IC3.5 JP6.1
GND1_D: IC4.5 JP4.1
GND1_E: IC5.5 JP8.1
GND1_F: IC6.5 JP3.1
GND1_G: IC7.5 JP14.1
GND1_H: IC8.5 JP16.1
GND1_I: IC9.5 JP18.1
GND2_A: IC1.12 JP9.6
GND2_B: IC2.12 JP11.6
GND2_C: IC3.12 JP5.6
GND2_D: IC4.12 JP1.6
GND2_E: IC5.12 JP7.6
GND2_F: IC6.12 JP2.6
GND2_G: IC7.12 JP13.6
GND2_H: IC8.12 JP15.6
GND2_I: IC9.12 JP17.6
GND3: C38.1 C39.2 C40.2 C42.1 C43.2 C44.1 C46.2 C47.2 C48.2 C49.2 C50.1 C51.2 C52.1 C53.1 C54.1 C55.1 C56.1 C57.2 C58.2 C59.2 C60.2 C61.1 JP19.1 JP20.1 JP21.1 JP22.1 LT1790B2.A LT1790B.A R89.P$1 R97.1 R105.P$1 R107.P$1 R108.1 REG1.2 U19.13 U20.13 U$7.4 U$8.GND U$14.P$1 U$15.P$1 U$20.P$1 U$21.4 U$22.2 U$22.8 X2.4
GND4: C62.2 C63.2 C64.2 C65.2 C66.2 C67.2 NA1.1 Q6.2 Q7.2 R113.2 R114.2 R115.2 U$31.13 U$31.14 X3.P$1
GRN1: Q6.1 R114.1 U$31.5
HV+FUSED_1A [TS]: HV+FUSED_1A-IMD+.P$1 HV+FUSED_1A-IMD+.P$2 HV+FUSED_1A-IMD+.P$3 HV+FUSED_1A-IMD+.P$4 R48.2 U17.1
HV+UNFUSED [TS]: C24.P$1 HV+UNFUSED.P$1 HV+UNFUSED.P$2 U15.CONTACT1
HV+UNFUSED_FSAE_DISCHARGE [TS]: DISCH+.P$1 DISCH+.P$2 U15.CONTACT2
HV-FUSED_1A [TS]: HV-FUSED_1A-IMD-.P$1 HV-FUSED_1A-IMD-.P$2 HV-FUSED_1A-IMD-.P$3 HV-FUSED_1A-IMD-.P$4 Q2.2 R46.1 R53.2 U16.4 U16.5 U16.9
HV-UNFUSED [TS]: C24.P$2 HV-UNFUSED_DISCHARGE-.P$1 HV-UNFUSED_DISCHARGE-.P$2 HV-UNFUSED_DISCHARGE-.P$3 HV-UNFUSED_DISCHARGE-.P$4
IM: U9.10 U11.P$10
IMD_PWR_STEP: D7.A D9.A IMD_SHUTDOWN_RLY.3 IMD_SHUTDOWN_RLY.COIL-
INB-: C45.1 R91.P$1 R95.P$2 U$7.6
INT1_A: IC1.11 JP9.5
INT1_B: IC2.11 JP11.5
INT1_C: IC3.11 JP5.5
INT1_D: IC4.11 JP1.5
INT1_E: IC5.11 JP7.5
INT1_F: IC6.11 JP2.5
INT1_G: IC7.11 JP13.5
INT1_H: IC8.11 JP15.5
INT1_I: IC9.11 JP17.5
INT2_A: IC1.9 JP9.4
INT2_B: IC2.9 JP11.4
INT2_C: IC3.9 JP5.4
INT2_D: IC4.9 JP1.4
INT2_E: IC5.9 JP7.4
INT2_F: IC6.9 JP2.4
INT2_G: IC7.9 JP13.4
INT2_H: IC8.9 JP15.4
INT2_I: IC9.9 JP17.4
IO_VDD_A: IC1.1 JP10.3
IO_VDD_B: IC2.1 JP12.3
IO_VDD_C: IC3.1 JP6.3
IO_VDD_D: IC4.1 JP4.3
IO_VDD_E: IC5.1 JP8.3
IO_VDD_F: IC6.1 JP3.3
IO_VDD_G: IC7.1 JP14.3
IO_VDD_H: IC8.1 JP16.3
IO_VDD_I: IC9.1 JP18.3
IP: U9.11 U11.P$12
ISOSPI-M [ISO_SPI]: ISO_SPI.P$2 R28.2 U11.P$3
ISOSPI-P [ISO_SPI]: ISO_SPI.P$1 R28.1 U11.P$1
LATCH_EXT_BUTTON: D1.C D9.C LED6.C S1.A1 S1.A2
LED1_THERM1: LED13.X
LED2_THERM1: LED14.X
LED3_THERM1: LED15.X
LED4_THERM1: LED16.X
LED5_THERM1: LED17.X
LED6_THERM1: LED18.X
LED7_THERM1: LED19.X
LED8_THERM1: LED20.X
MISO: R26.2 TEENSY3.2.D12 U9.3 U12.12
MOSI_5V: U12.11 U13.10
MOSI_TEENSY: R25.2 TEENSY3.2.D11 U9.2 U13.5
N$1: POWERTAIL.P$2 Q1.3
N$2: LED6.A R6.2
N$3: LED4.A R8.2
N$4: CAN_TRANSCEIVER_3.5.4 U$5.D4(CANRX)
N$5: Q1.1 R11.1 R12.2
N$6: CAN_TRANSCEIVER_3.5.1 U$5.D3(CANTX)
N$7: R17.1 STATUS1.A
N$8: R15.1 STATUS.A
N$9: R17.2 U$5.D8(TX3)
N$10: R14.2 U$2.1
N$11: R15.2 U$4.D8(TX3)
N$12: D7.C IMD_SHUTDOWN_RLY.COIL+ R13.2
N$13: ON-LED.C R20.1
N$14: R21.2 U7.8
N$15: CAN_TRANSCEIVER_3.2.4 U$4.D4(CANRX)
N$16: R22.1 TEENSY.C
N$17: CAN_TERM_JMP.2 R10.2
N$18: R23.2 R24.1 U9.15
N$19: R3.2 SHUTDOWN_B.A
N$20: C11.1 U3.1 U3.6
N$21: C12.1 U3.8
N$22: CAN_TRANSCEIVER_3.2.1 U$4.D3(CANTX)
N$23: U12.10 U13.13
N$24: C13.2 R31.1 R32.1
N$25: TEENSY3.2.D3(CANTX) U7.1
N$26: LED3.A R7.2
N$27: R33.1 R34.2 U1.6
N$28: D11.A R35.2 R36.2
N$29: LED1.A R5.2
N$30: D12.A R37.2 R38.2
N$31: R23.1 U9.16
N$32: R4.2 SHUTDOWN_C.A
N$33: D13.A R39.2 R40.2
N$34: R44.1 R45.1 U17.3
N$35: C19.1 U11.P$11
N$36: TEENSY3.2.D4(CANRX) U7.4
N$37: TEENSY3.2.D7(RX3) TEENSY.A
N$38: R27.2 U8.2 U10.WDO
N$39: R47.1 R48.1
N$40: TEENSY3.2.A1 U8.1
N$41: R47.2 R49.2 U16.1 U16.2
N$42: IMD-OK.A U1.1 U1.2
N$43: R46.2 R49.1
N$44: BMS-OK.C R19.1
N$45: IMD-OK.C R18.2
N$46: R44.2 R50.1
N$47: R45.2 R53.1
N$48: C16.1 U6.1 U6.6
N$49: C15.1 U6.8
N$50: R30.1 TEENSY3.2.A0 U10.WDI
N$51: C25.1 U4.1 U4.6
N$52: C26.1 U4.8
N$53: C27.1 U5.1 U5.6
N$54: C28.1 U5.8
N$55: INDICATOR.P$2 Q2.3
N$56: Q3.1 U16.15
N$57: Q2.1 U16.10
N$58: INDICATOR.P$1 R50.2 U16.3 U16.6 U16.8 U16.11 U17.2(TAB)
N$59: D15.A R55.2 R56.2
N$60: BMS_SHUTDOWN_RLY.4 IMD_SHUTDOWN_RLY.4 R2.2 R16.2
N$61: D16.A R57.2 R58.2
N$62: C5.1 R9.2 R10.1
N$76: R67.P$2 R85.P$2 U$7.2
N$77: R72.P$2 R94.P$1 U$7.3
N$78: C50.2 LT1790B.C R95.P$1 R96.P$1 TM1.2
N$79: R81.P$2 TM1.1
N$80: J1.1 U$8.A0
N$81: J2.1 U$8.A3
N$82: J3.1 U$8.A6
N$83: R68.P$2 R69.P$2 R71.P$1
N$84: C44.2 LT1790B2.C R76.P$1 R77.P$1 TM3.2
N$85: R73.P$2 TM3.1
N$86: R79.P$2 R83.P$1
N$87: R69.P$1 R84.P$2
N$88: R82.P$1 R86.P$2
N$89: R78.P$2 R86.P$1
N$90: R79.P$1 R87.P$2
N$91: R68.P$1 R88.P$2
N$92: R80.P$2 R88.P$1
N$93: R84.P$1 R89.P$2
N$94: R73.P$1 R90.P$1
N$95: R90.P$2 R92.P$2
N$96: R81.P$1 R93.P$1
N$97: R93.P$2 R94.P$2
N$98: U$8.D3(CANTX) U$22.1
N$99: U$8.D4(CANRX) U$22.4
N$100: R98.P$1 R100.P$2
N$101: R98.P$2 R99.P$1
N$102: R1_3.1 R1_4.2 R1_11.1 U$21.6
N$103: R1_1.2 R1_3.2 U$21.7
N$104: R1_1.1 R1_2.1 R1_11.2 U$21.2
N$105: R1_4.1 R101.P$1 R105.P$2
N$106: R102.P$2 R104.P$1
N$107: R103.P$1 R104.P$2
N$108: R1_5.1 R106.P$1 R107.P$2
N$109: J4.1 U$8.A9
N$110: R108.2 U$26.P$1 U$27.P$1
N$111: LED14.C Q6.3
N$112: C62.1 NA1.2 NA1.6 R110.1
N$113: NA1.7 R110.2 R112.2
N$114: LED13.A R111.1
N$115: LED20.C Q7.3 R113.1
N$116: C63.1 NA1.5
N$117: LED15.A R109.2
N$118: LED14.A LED17.C
N$119: LED13.C LED18.A
N$120: LED18.C LED19.A
N$121: LED19.C LED20.A
N$122: LED16.C LED17.A
N$123: LED15.C LED16.A
NCS_A: IC1.8 JP9.3
NCS_B: IC2.8 JP11.3
NCS_C: IC3.8 JP5.3
NCS_D: IC4.8 JP1.3
NCS_E: IC5.8 JP7.3
NCS_F: IC6.8 JP2.3
NCS_G: IC7.8 JP13.3
NCS_H: IC8.8 JP15.3
NCS_I: IC9.8 JP17.3
OKHS: MAIN.P$6 R7.1 R13.1 R16.1
OKHS1: IMD.P$5 MAIN1.P$5 R29.1 R57.1 U1.3
OKHS_TEENSY: D16.C TEENSY3.2.A7
OUT1: R85.P$1 U$7.1 U$7.5
OUT4: R74.P$1 U19.1 U19.5
OUT4A+: R71.P$2 R92.P$1 U19.3
OUT4A-: R70.P$2 R74.P$2 U19.2
RED1: NA1.3 Q7.1 R115.1
REF1_SENSE: CURRENT1.P$3 U6.2
REF1_SENSE_FILTERED: R41.2 U6.5 U12.2
REF2_SENSE: CURRENT2.P$3 U5.2
REF2_SENSE_FILTERED: U5.5 U12.8
SCK_5V: U12.13 U13.11
SCK_TEENSY: TEENSY3.2.D13 U9.4 U13.4
SCLK_A: IC1.4 JP10.2
SCLK_B: IC2.4 JP12.2
SCLK_C: IC3.4 JP6.2
SCLK_D: IC4.4 JP4.2
SCLK_E: IC5.4 JP8.2
SCLK_F: IC6.4 JP3.2
SCLK_G: IC7.4 JP14.2
SCLK_H: IC8.4 JP16.2
SCLK_I: IC9.4 JP18.2
SDI_A: IC1.6 JP9.1
SDI_B: IC2.6 JP11.1
SDI_C: IC3.6 JP5.1
SDI_D: IC4.6 JP1.1
SDI_E: IC5.6 JP7.1
SDI_F: IC6.6 JP2.1
SDI_G: IC7.6 JP13.1
SDI_H: IC8.6 JP15.1
SDI_I: IC9.6 JP17.1
SDO_A: IC1.7 JP9.2
SDO_B: IC2.7 JP11.2
SDO_C: IC3.7 JP5.2
SDO_D: IC4.7 JP1.2
SDO_E: IC5.7 JP7.2
SDO_F: IC6.7 JP2.2
SDO_G: IC7.7 JP13.2
SDO_H: IC8.7 JP15.2
SDO_I: IC9.7 JP17.2
SG_BOT: R87.P$1 R97.2 U$19.P$1
SG_V1: R82.P$2 R83.P$2 U$21.5
SG_V2: R100.P$1 U$9.P$1 U$21.3
SHUTDOWN_A: 5ASHUTDOWNFUSE.R1 5ASHUTDOWNFUSE.R2 D8.A IMD_SHUTDOWN_RLY.6
SHUTDOWN_A_TEENSY: D8.C U$4.A0
SHUTDOWN_B: BMS_SHUTDOWN_RLY.6 D5.A IMD_SHUTDOWN_RLY.5 R3.1
SHUTDOWN_B_TEENSY: D5.C U$4.A1
SHUTDOWN_C: BMS_SHUTDOWN_RLY.5 D4.A R4.1 SHUTDOWN_BUTTON.P$2
SHUTDOWN_C_TEENSY: D4.C U$4.A2
SHUTDOWN_D: D2.A MAIN.P$5 SHUTDOWN_BUTTON.P$1
SHUTDOWN_D_TEENSY: D2.C U$4.A3
SHUTDOWN_G: INTERLOCK.P$1 MAIN1.P$6 R35.1
SHUTDOWN_G_TEENSY: D11.C TEENSY3.2.A5
SHUTDOWN_H: D10.A D14.C INTERLOCK.P$2 R37.1 RELAY.P$1 U15.COIL+
SHUTDOWN_H_TEENSY: D12.C TEENSY3.2.A4
SIGNAL1: U$31.10 X3.P$3
TOGGLE_CHARGER: R14.1 U$4.D0(RX1)
TRIG_A: IC1.13 JP10.5
TRIG_B: IC2.13 JP12.5
TRIG_C: IC3.13 JP6.5
TRIG_D: IC4.13 JP4.5
TRIG_E: IC5.13 JP8.5
TRIG_F: IC6.13 JP3.5
TRIG_G: IC7.13 JP14.5
TRIG_H: IC8.13 JP16.5
TRIG_I: IC9.13 JP18.5
V1: C64.1 C65.1 NA1.4 NA1.8 R112.1 U$31.9
V+1: R67.P$1 U$12.P$1 U$13.P$1
V-1: R72.P$1 U$16.P$1 U$17.P$1
VCC1: C66.1 C67.1 R109.1 R111.2 U$31.6 U$31.8 U$31.11 U$31.12 X3.P$2
VDD_A: IC1.14 JP10.4
VDD_B: IC2.14 JP12.4
VDD_C: IC3.14 JP6.4
VDD_D: IC4.14 JP4.4
VDD_E: IC5.14 JP8.4
VDD_F: IC6.14 JP3.4
VDD_G: IC7.14 JP14.4
VDD_H: IC8.14 JP16.4
VDD_I: IC9.14 JP18.4
VOUT1: C45.2 J1.2 JP19.2 R91.P$2 U$7.7
VOUT2: J3.2 JP22.2 R1_7.2 U20.16
VOUT3: J4.2 JP21.2 R1_2.2 U$21.1
VOUT4: C41.2 J2.2 JP20.2 R75.P$2 U19.7
VOUT4-: C41.1 R75.P$1 R76.P$2 U19.6
VR4-2: R70.P$1 R102.P$1 U$10.P$1
VREF: R1_5.2 R1_8.1 R1_9.1 U20.2
WBV1: U20.3 U$28.P$1 U$29.P$1
WBV1OUT: R1_6.2 R1_8.2 U20.1
WBV2: U20.14 U$24.P$1 U$25.P$1
WBV2-I: R1_6.1 R1_7.1 R1_9.2 U20.15

## Tracks (layer width: path | path; a pad name or v marks a point on that pad's centre or on a via)
3V3
  Top 0.406: R78.P$1 107.4,28.04 R101.P$2
  Bottom 0.356: U19.4 161.95,23.41 | 135.67,35.15 136.17,35.65 U20.4 137.44,35.66 139.36,35.66 | U$21.8 110.37,25.01 110.37,25.04 111.06,25.73 C56.2
  Bottom 0.406: U$18.P$1 189.16,42.93 U$11.P$1 | 161.95,23.41 161.91,23.37 C42.2 156.77,23.37 C43.1 155.63,22.22 150.91,22.22 148.85,24.28 146.61,24.28 144.97,25.93 144.97,28.86 145.88,29.77 147.16,29.77 148.74,28.19 152.59,28.19 152.77,28.37 154.91,28.37 156.07,29.53 156.07,30.31 152.59,33.78 152.59,34.29 144.12,34.29 142.74,35.67 | C40.1 144.73,47.77 C39.1 144.49,37.41 | C40.1 144.74,50.33 145.74,51.33 168.19,51.33 170.39,49.13 170.39,26.44 | C46.1 187.17,45.74 C47.1 185.13,44.93 U$18.P$1 | C51.1 182.43,27.35 C38.2 186.7,27.35 187.79,26.26 U$7.8 | C51.1 182.22,27.19 179.89,28.09 177.43,30.54 177.43,32.5 181.34,36.41 181.34,41.15 U$18.P$1 | C51.1 182.31,23.22 R96.P$2 178.13,26.44 170.39,26.44 | R77.P$2 169.12,26.44 170.39,26.44 | U$8.3.3V 83.57,45.99 84.53,45.99 85.3,46.76 85.3,48.54 87.36,50.6 C48.1 106.34,50.6 C49.1 | 144.49,37.41 R80.P$1 156.98,45.14 R103.P$2 | 144.49,37.41 142.74,35.67 | C40.1 142.53,49.81 141.79,50.55 139.99,50.55 137.63,48.18 U$30.P$1 132.83,40.84 U$23.P$1 132.75,47.68 130.47,49.96 127.63,49.96 C59.1 125.65,45.46 C58.1 125.72,44.21 122.43,44.21 116.44,50.2 C49.1 | C60.1 132.18,30.15 C61.2 134.28,29.92 R106.P$2 135.67,30.73 135.67,35.15 | 142.74,35.67 142.72,35.65 139.37,35.65 139.36,35.66 | R78.P$1 105.8,26.9 103.59,29.11 103.59,35.97 R99.P$2 102.81,38.23 102.81,45.62 107.2,45.62 108.22,46.63 108.22,48.73 C49.1 | C56.2 112.12,25.36 C57.1 115.71,27.21 R101.P$2
60V_THRESHOLD_SIGNAL  (via drill 0.35)
  Top 0.305: MAIN1.P$1 48.62,87.29 49.82,86.08 49.82,85.17 50.62,84.38 51.67,84.38 53.77,82.28 59.05,82.28 66.72,74.61 66.72,70.82 72.37,65.18 73.13,65.18 77.45,60.86 v77.45,59.59 | v72.92,60.35 v74.65,58.62
  Bottom 0.305: R55.1 v72.92,60.35 | R59.1 79.63,60.67 Q3.2 78.65,60.67 77.57,59.59 v77.45,59.59 76.48,58.62 v74.65,58.62
60V_THRESHOLD_TEENSY  (via drill 0.35)
  Top 0.305: TEENSY3.2.A6 47.22,71.53 52.71,66.03 56.9,66.03 60.68,62.26 v66.52,62.26
  Bottom 0.305: D15.C 66.52,59.2 v66.52,62.26
+3V3  (via drill 0.35)
  Top 0.305: v41.81,92.1 41.76,92.05 v41.76,84.35 | v42.39,68.22 37.31,73.31 TEENSY3.2.3.3V | v62.46,66.7 61.82,66.7 61.27,66.14 61.27,65.15 62.53,63.89 v63.33,63.89
  Bottom 0.305: U9.6 42.03,94.06 41.81,93.84 v41.81,92.1 | v41.76,84.35 40.62,83.21 40.62,76.99 37.06,73.43 TEENSY3.2.3.3V | v63.33,63.89 65,62.22 R26.1 R25.1 60.85,60.22 50.14,60.22 49.18,61.19 U13.1 49.18,62.73 45.28,66.63 U13.8 44.14,67.71 C21.1 42.56,68.06 v42.39,68.22 | v62.46,66.7 63.88,66.7 64.21,67.03 64.21,68.02 64,68.24 64,68.48 U8.5
+5V  (via drill 0.35)
  Top 0.305: REG.3 227.27,74.32 C4.2 224.49,72.03 224.49,63.14 R5.1 221.7,60.11 220.68,59.08 214.08,59.08 R6.1 212.81,62.54 213.16,62.89 214.32,62.89 214.32,64.41 213.59,65.14 213.39,65.14 209.29,69.24 209.29,72.81 208.29,73.81 207.22,73.81 206.07,74.96 CAN_TRANSCEIVER_3.5.3 206.07,77.5 205.44,78.13 v204.16,78.13 209.25,83.21 C6.2 C7.2 C1.2 C2.2 209.49,108.19 209.59,108.3 209.59,108.92 209.49,109.03 v209.49,117.5 | v210.51,130.2 U$4.VIN 220.68,139.09 221.94,137.82 237.19,137.82 U$5.VIN | v200.36,78.13 199.72,77.5 CAN_TRANSCEIVER_3.2.3 199.72,73.69 197.77,71.73 197.77,64.17 193.99,60.39 POWERTAIL.P$1
  Bottom 0.305: v200.36,78.13 v204.16,78.13 | v209.49,117.5 209.49,129.18 v210.51,130.2
+5V1  (via drill 0.35, 0.65)
  Top 0.305: v34.09,59.91 v38.2,59.91 v38.2,59.9 | CURRENT1.P$1 72.6,102.11 72.03,102.68 68.81,102.68 68.6,102.47 | ON-LED.A 47.47,96.51 v47.47,97.18 | CURRENT2.P$1 72.6,81.79 72.03,82.36 70.93,82.36 70.08,83.21 v70.08,89.56 70.08,90.45 69.44,91.08 | v49.01,104.7 47.27,102.96 47.27,100.94 49.52,98.69 | TEENSY3.2.VIN 31.98,70.51 33.25,69.24 35.73,69.24 40.81,64.16 41.58,64.16 | v41.58,65.43 41.58,64.16 | v73.89,107.34 72.62,106.07 67.54,106.07 | 68.6,102.47 66.69,100.57 66.69,94.98 68.81,92.86 68.81,91.08 | 68.6,102.47 67.54,103.53 67.54,106.07 | v67.16,107.59 67.54,107.21 67.54,106.07 | 41.58,64.16 v41.58,63.39 | v69.46,81.94 69.46,74.54 68.51,73.59 68.51,72.97 v70.21,71.27 73.59,71.27 v74.1,71.78
  Top 0.61: TEENSY3.2.VIN 31.13,74.15 v31.13,81.94 | v47.47,97.18 48,97.18 49.52,98.69 50.11,99.29 56.54,99.29 64.75,91.08 68.81,91.08 69.44,91.08 | U2.3 32.49,100.86 v32.49,99.72
  Bottom 0.305: U3.4 72.37,108.99 73.95,107.4 | U6.7 73.25,95.28 | 73.25,95.28 75.79,92.74 U6.4 76.43,92.68 76.43,92.1 75.88,91.55 C17.1 | U3.7 74.91,106.45 73.95,107.4 | 73.25,95.28 73.25,95.91 72.69,96.47 72.69,96.97 72.52,97.15 72.42,97.15 69.46,100.11 69.46,101.62 70.53,102.68 72.03,102.68 72.6,102.11 CURRENT1.P$1 | U5.4 71.29,89.53 71.61,89.85 C29.1 | U5.7 74.91,86.13 72.37,88.67 U5.4 | U4.7 71.98,74.96 74.52,72.42 | 74.52,72.42 75.16,72.42 | 75.16,72.42 U4.4 77.03,72.42 C18.1 | U14.6 48.7,106.71 C23.1 | C23.1 48.11,107.08 48.91,106.28 48.91,104.8 v49.01,104.7 | 74.52,72.42 74.52,72 74.31,71.78 v74.1,71.78 | U10.VCC 67.54,67.59 | 67.54,67.59 68.81,67.59 70.21,68.99 v70.21,71.27 | C23.1 50.05,109.25 U14.8 52.03,110.3 58.86,110.3 59.66,109.5 R43.2 | C31.1 C30.1 | v41.58,65.43 41.71,65.56 41.71,68.51 42.12,68.91 45.32,68.91 45.95,69.54 48.16,69.54 48.67,69.03 C22.1 49.18,68.95 U13.14 49.18,67.28 51.03,65.43 51.03,62.26 U12.16 U12.15 52.17,63.22 55.98,67.03 U12.5 | U9.1 44.53,96.65 44.68,96.8 | v69.46,81.94 69.46,87.67 70.08,88.29 | U5.4 70.46,88.67 70.08,88.29 | 73.95,107.4 v73.89,107.34 | U9.12 42.53,97.19 42.14,96.8 41.53,96.19 U9.7 U9.8 41.03,97.03 40.87,97.18 | v34.09,59.91 33.69,59.91 33,60.6 U7.3 | 67.54,67.59 67.54,66.92 R27.1 | 67.54,67.59 67.54,68.26 C20.1 | 75.16,72.42 75.16,63.16 Q3.3 | 39.47,98.58 40.37,98.58 U9.9 | v70.08,89.56 70.08,88.29 | v67.16,107.59 66.94,107.81 C10.1 | C31.1 41.58,62.75 v41.58,63.39 | C31.1 38.73,59.9 v38.2,59.9
  Bottom 0.61: U2.3 37.25,102.36 C8.1 39.45,100.24 39.45,98.6 39.47,98.58 40.87,97.18 41.25,96.8 42.14,96.8 44.68,96.8 46.46,96.8 46.84,97.18 v47.47,97.18 | v32.49,99.72 30.88,98.11 30.88,82.19 v31.13,81.94
+5V2
  Bottom 0.406: U$8.VIN 82.87,52.91 65.09,52.91 65.09,15.24 | 65.09,15.24 65.09,11 C53.2 REG1.3 | U$22.3 73.28,34.07 C54.2 73.28,27.61 | 73.28,27.61 C55.2 | 65.09,15.24 65.96,16.12 65.96,17.77 66.55,18.36 68.18,18.36 73.28,23.46 73.28,27.61
+12V  (via drill 0.35)
  Top 0.305: REG.1 237.19,70.51 236.16,69.49 C3.2 225.75,68.22 v225.75,67.97 | 195.94,59.69 195.32,59.07 190.96,59.07 190.2,59.82 190.2,60.88 190.31,60.98 190.31,63.2 192.22,65.12 192.22,69.54 U$2.4 195.74,77.67 192.74,80.67 188.67,80.67 5ABOARDFUSE.R2 5ABOARDFUSE.R1 | 195.94,59.69 199.03,56.59 211.78,56.59 v211.78,56.74 | MAIN.P$4 195.94,59.69
  Bottom 0.305: v225.75,67.97 220.68,67.97 214.32,61.62 214.32,59.28 v211.78,56.74
+12V1  (via drill 0.35, 0.65)
  Top 0.305: U16.16 82.57,61.62 v81.51,61.62 | MAIN1.P$7 51.5,85.58 53.96,83.12 58.99,83.12 67.22,74.9 67.22,71.48 72.31,66.39 73.44,66.39 78.21,61.62 v78.97,61.62
  Top 0.61: POWER1.P$1 31.47,91.09 | 31.47,91.09 31.47,97.18 | U2.1 33.35,107.44 31.47,105.56 31.47,97.18 | 31.47,91.09 31.47,83.72 ENERGYMETER.P$1 | v45.7,95.78 43.03,98.45 33.39,98.45 | 33.39,98.45 32.74,98.45 31.47,97.18 | MAIN1.P$7 52.47,86.94 52.47,88.65 50.29,90.83 v49.76,90.83 | IMD.P$1 33.39,98.45
  Bottom 0.305: U1.8 51.51,96.08 C14.1 | v78.97,61.62 v81.51,61.62
  Bottom 0.61: U2.1 36.99,107.44 C9.1 | v49.76,90.83 48.74,91.85 C14.1 48.45,95.78 v45.7,95.78
+12V2
  Bottom 0.406: REG1.1 C52.2 82.87,10.31 85.35,7.83 X2.1
+12VIN  (via drill 0.35)
  Top 0.305: 5ASHUTDOWNFUSE.L2 5ASHUTDOWNFUSE.L1 | POWER.P$2 182.57,61.64 v182.57,69.24
  Bottom 0.305: 5ASHUTDOWNFUSE.L2 5ABOARDFUSE.L1 5ABOARDFUSE.L2 182.57,76.86 v182.57,69.24
BMS_OK  (via drill 0.35)
  Top 0.305: R1.1 187.9,104.56 188.93,103.53 191.71,103.53 | v192.74,79.4 194,78.13 v194,75.59 | v194,80.67 192.74,81.94 190.19,81.94 v190.19,87.02 | v197.81,59.08 200.34,59.08 MAIN.P$7 204.22,57.81 v205.44,57.81 | R8.1 230.53,60.35 229.4,59.22 227.68,59.22 226.55,60.35 v224.49,60.35 | v218.13,62.89 v214.32,66.7 | v195.28,62.89 195.28,65.43 v196.55,66.7 | R2.1 191.71,103.53 | v192.74,99.72 191.71,100.75 191.71,103.53
  Bottom 0.305: v194,80.67 v192.74,79.4 | v194,75.59 194,69.24 194.52,68.73 195.59,68.73 196.55,67.77 v196.55,66.7 | v190.19,87.02 191.47,88.29 192.74,88.29 v192.74,99.72 | v197.81,59.08 195.28,61.62 v195.28,62.89 | v224.49,60.35 221.94,62.89 v218.13,62.89 | v205.44,57.81 206.73,59.11 207.18,59.11 207.93,59.86 207.93,60.3 v214.32,66.7
BMS_OK_3.3V  (via drill 0.35)
  Top 0.305: v66.9,77.11 61.95,82.07 61.95,85.78 60.58,87.16 60.58,91.24 57.57,94.24 57.57,94.33 56.25,95.66 v56.25,95.91
  Bottom 0.305: U1.5 55.54,95.91 v56.25,95.91 | U8.4 66.58,69.31 66.58,70.81 66.9,71.13 v66.9,77.11
BMS_OK_10V  (via drill 0.35)
  Top 0.305: v49.76,92.1 45.46,87.8 45.46,83.6 48.47,80.58 MAIN1.P$4 | v50.39,95.28 49.98,95.69 BMS-OK.A
  Bottom 0.305: R33.2 R51.1 56.63,99.9 53.88,99.9 53.47,99.49 53.47,96.77 U1.7 52.81,95.15 52.3,94.64 | 52.3,94.64 v49.76,92.1 | v50.39,95.28 51.03,94.64 52.3,94.64
BMS_OK_RELAY
  Top 0.305: BMS_SHUTDOWN_RLY.COIL+ 192.36,111.91 193.05,111.91 193.63,111.32 D6.C 192.23,107.2 190.85,107.2 190.63,106.98 190.63,106.75 R1.2
BMS_PWR_STEP  (via drill 0.35)
  Top 0.305: D1.A D6.A 191.84,110.25 v192.74,111.15
  Bottom 0.305: v192.74,111.15 195.66,114.07 BMS_SHUTDOWN_RLY.COIL- 195.28,116.48 195.28,130.2 191.39,134.09 BMS_SHUTDOWN_RLY.3
BSPD_CURR_REFERENCE
  Bottom 0.305: U14.3 61.74,106.71 R42.2 64.58,103.86 R41.1
BSPD_CURR_SIGNAL  (via drill 0.35)
  Top 0.305: v58.5,103.39 55.49,103.39 v55.47,103.4 | v60.51,101.08 60.51,98.75 v62.08,97.18 | v53.57,87.02 54.84,88.29 54.84,90.04 v57.77,92.97
  Bottom 0.305: v58.5,103.39 60.81,101.08 60.81,100.99 60.6,100.99 v60.51,101.08 | v57.77,92.97 57.9,92.97 62.08,97.15 v62.08,97.18 | R43.1 57.93,109.25 U14.1 55.5,108.58 54.94,108.58 54.76,108.4 54.76,104.62 55.47,103.91 v55.47,103.4 | MAIN1.P$3 49.91,84.38 49.91,86.08 50.62,86.79 53.34,86.79 v53.57,87.02
CANH  (via drill 0.35)
  Top 0.305: CAN_TRANSCEIVER_3.2.7 200.99,72.42 v201.62,73.05 | 207.34,72.42 206.71,73.05 v204.16,73.05 | U$1.2 219.41,98.4 219.41,83.21 CAN_TERM_JMP.1 | v207.97,73.05 207.34,72.42 | 207.34,72.42 CAN_TRANSCEIVER_3.5.7 207.34,64.16 206.65,63.47 MAIN.P$1
  Bottom 0.305: CAN_TERM_JMP.1 209.25,73.05 v207.97,73.05 | v201.62,73.05 v204.16,73.05
CANH1  (via drill 0.35)
  Top 0.305: MAIN1.P$10 49.91,76.88 48.12,76.88 47.35,77.64 ENERGYMETER.P$4 35.64,76.09 35.64,70.77 v34.95,70.08
  Bottom 0.305: ENERGYMETER.P$4 39.09,79.64 39.09,81.65 37.32,83.42 POWER1.P$4 37.85,86.3 R31.2 | MAIN1.P$10 51.43,78.4 U18.2 | U7.7 34.14,69.27 v34.95,70.08
CANH2
  Top 0.406: U$22.7 75.91,36.17 75.91,33.15 77.76,31.29 77.76,16.79 78.39,16.15 79.77,16.15 80.45,15.47 83.96,15.47 84.97,14.45 84.97,13.16 87.95,10.19 92.8,10.19 94.91,8.07 X2.3
CANL  (via drill 0.35)
  Top 0.305: 206.07,68.61 CAN_TRANSCEIVER_3.5.6 | 206.07,68.61 205.44,67.97 200.36,67.97 199.72,68.61 CAN_TRANSCEIVER_3.2.6 199.72,72.42 v200.36,73.05 | U$1.1 215.91,97.89 216.11,97.69 | R9.1 216.11,97.69 | v215.59,97.18 216.11,97.69 | 206.07,68.61 206.07,64.69 204.27,62.89 MAIN.P$2
  Bottom 0.305: v200.36,73.05 209.25,81.94 214.32,81.94 215.59,83.21 v215.59,97.18
CANL1
  Top 0.305: MAIN1.P$9 50.32,80.58 49.12,79.38 38.32,79.38 ENERGYMETER.P$3
  Bottom 0.305: 36.97,83.12 37.32,82.77 ENERGYMETER.P$3 | 36.97,83.12 36.03,84.07 36.03,86.97 POWER1.P$3 38.61,89.56 38.67,89.56 38.67,91.04 38.67,91.05 R32.2 | U7.6 33,76.53 31.66,77.86 31.66,79.87 33.49,81.7 35.55,81.7 36.97,83.12 | U18.1 53.52,79.4 52.3,79.4 MAIN1.P$9
CANL2
  Top 0.406: U$22.6 78.42,36.35 76.59,34.52 76.59,33.39 78.32,31.66 78.32,17.02 78.63,16.71 80,16.71 80.68,16.03 84.26,16.03 85.56,14.73 85.56,13.46 86.99,12.03 X2.2
CHARGE_CONTROL  (via drill 0.61)
  Top 0.305: 168.62,108.61 U$3.C1
  Top 0.61: v171.15,94.64 171.15,98.08 D3.C 168.62,100.6 168.62,108.61 | v195.15,67.92 195.2,67.97 195.28,67.97 195.74,68.43 U$2.3
  Bottom 0.61: v171.15,94.64 171.15,70.51 173.69,67.97 195.28,67.97 195.22,67.92 v195.15,67.92
CHARGE_ENABLE  (via drill 0.35)
  Top 0.305: v190.19,64.16 187.66,64.16 187.02,64.8 187.02,71.15 185.12,73.05 v183.84,73.05 | v183.84,88.29 v183.84,94.64 | v183.84,100.99 185.12,102.26 187.66,102.26 v188.93,100.99 | ZENER.3 194.76,98.18 R11.2 194,97.43 v194,99.72
  Bottom 0.305: MAIN.P$8 195.38,64.16 v190.19,64.16 | v183.84,73.05 v183.84,88.29 | v183.84,94.64 v183.84,100.99 | v188.93,100.99 192.74,100.99 v194,99.72
CHARGE_ENABLE1  (via drill 0.35)
  Top 0.305: v65,80.67 62.71,82.96 62.71,91.21 D10.C
  Bottom 0.305: MAIN1.P$2 48.62,85.88 49.91,87.17 49.91,88.58 51.89,90.56 52.66,90.56 D10.C | v65,80.67 65.09,80.58 R39.1
CHARGE_ENABLE_TEENSY
  Bottom 0.305: D13.C 60.78,74.92 59.52,74.92 58.96,74.36 58.96,72.09 58.56,71.69 56.45,71.69 TEENSY3.2.A3
CHARGER_1
  Top 0.61: U$3.S1 154.63,111.27 CHARGER.P$1
CHARGER_2
  Top 0.305: 154.72,85.83 154.68,85.87 154.68,98.43 CHARGER.P$2
  Top 0.61: U$3.S2 154.72,85.83 154.72,98.39 CHARGER.P$2
CS_LTC6820  (via drill 0.35)
  Top 0.305: v42.72,91.88 42.52,91.68 42.52,84.23 v43.16,83.59 | TEENSY3.2.D10(TX2) 54.96,63.02 48.91,63.02 43.72,68.21 43.72,73.88 42.39,75.21 v42.07,75.21
  Bottom 0.305: U9.5 42.53,92.07 v42.72,91.88 | v43.16,83.59 42.27,82.7 42.27,75.41 v42.07,75.21
CS_MCP3208_3.3V
  Bottom 0.305: TEENSY3.2.D9(RX2) 55.77,59.68 49.76,59.68 48.53,60.91 U13.2
CURR1_SENSE
  Bottom 0.305: U3.2 71.85,106.45 73.82,104.48 73.82,103.53 | CURRENT1.P$2 73.82,100.82 73.82,103.53 | 73.82,103.53 71.05,103.53 71,103.48 68.95,103.48 R52.1
CURR1_SENSE_FILTERED  (via drill 0.35)